# Altium PCB BEAGLEPLAYV020_220915.brd.PcbDoc (part 6 of 12)
Units mil, origin at the board's own origin, x right, y up, seen from the top; angles counter-clockwise.
Board outline 3149.7 x 3149.7 mil, 8 copper layers (TOP, LYR2_GND, LYR3, LAY4_PWR1, LAY5_PWR2, LAY6, LYR7_GND, BOTTOM), stack 60.84 mil thick; 782 components, 546 nets, 2864 pads, 2056 vias.
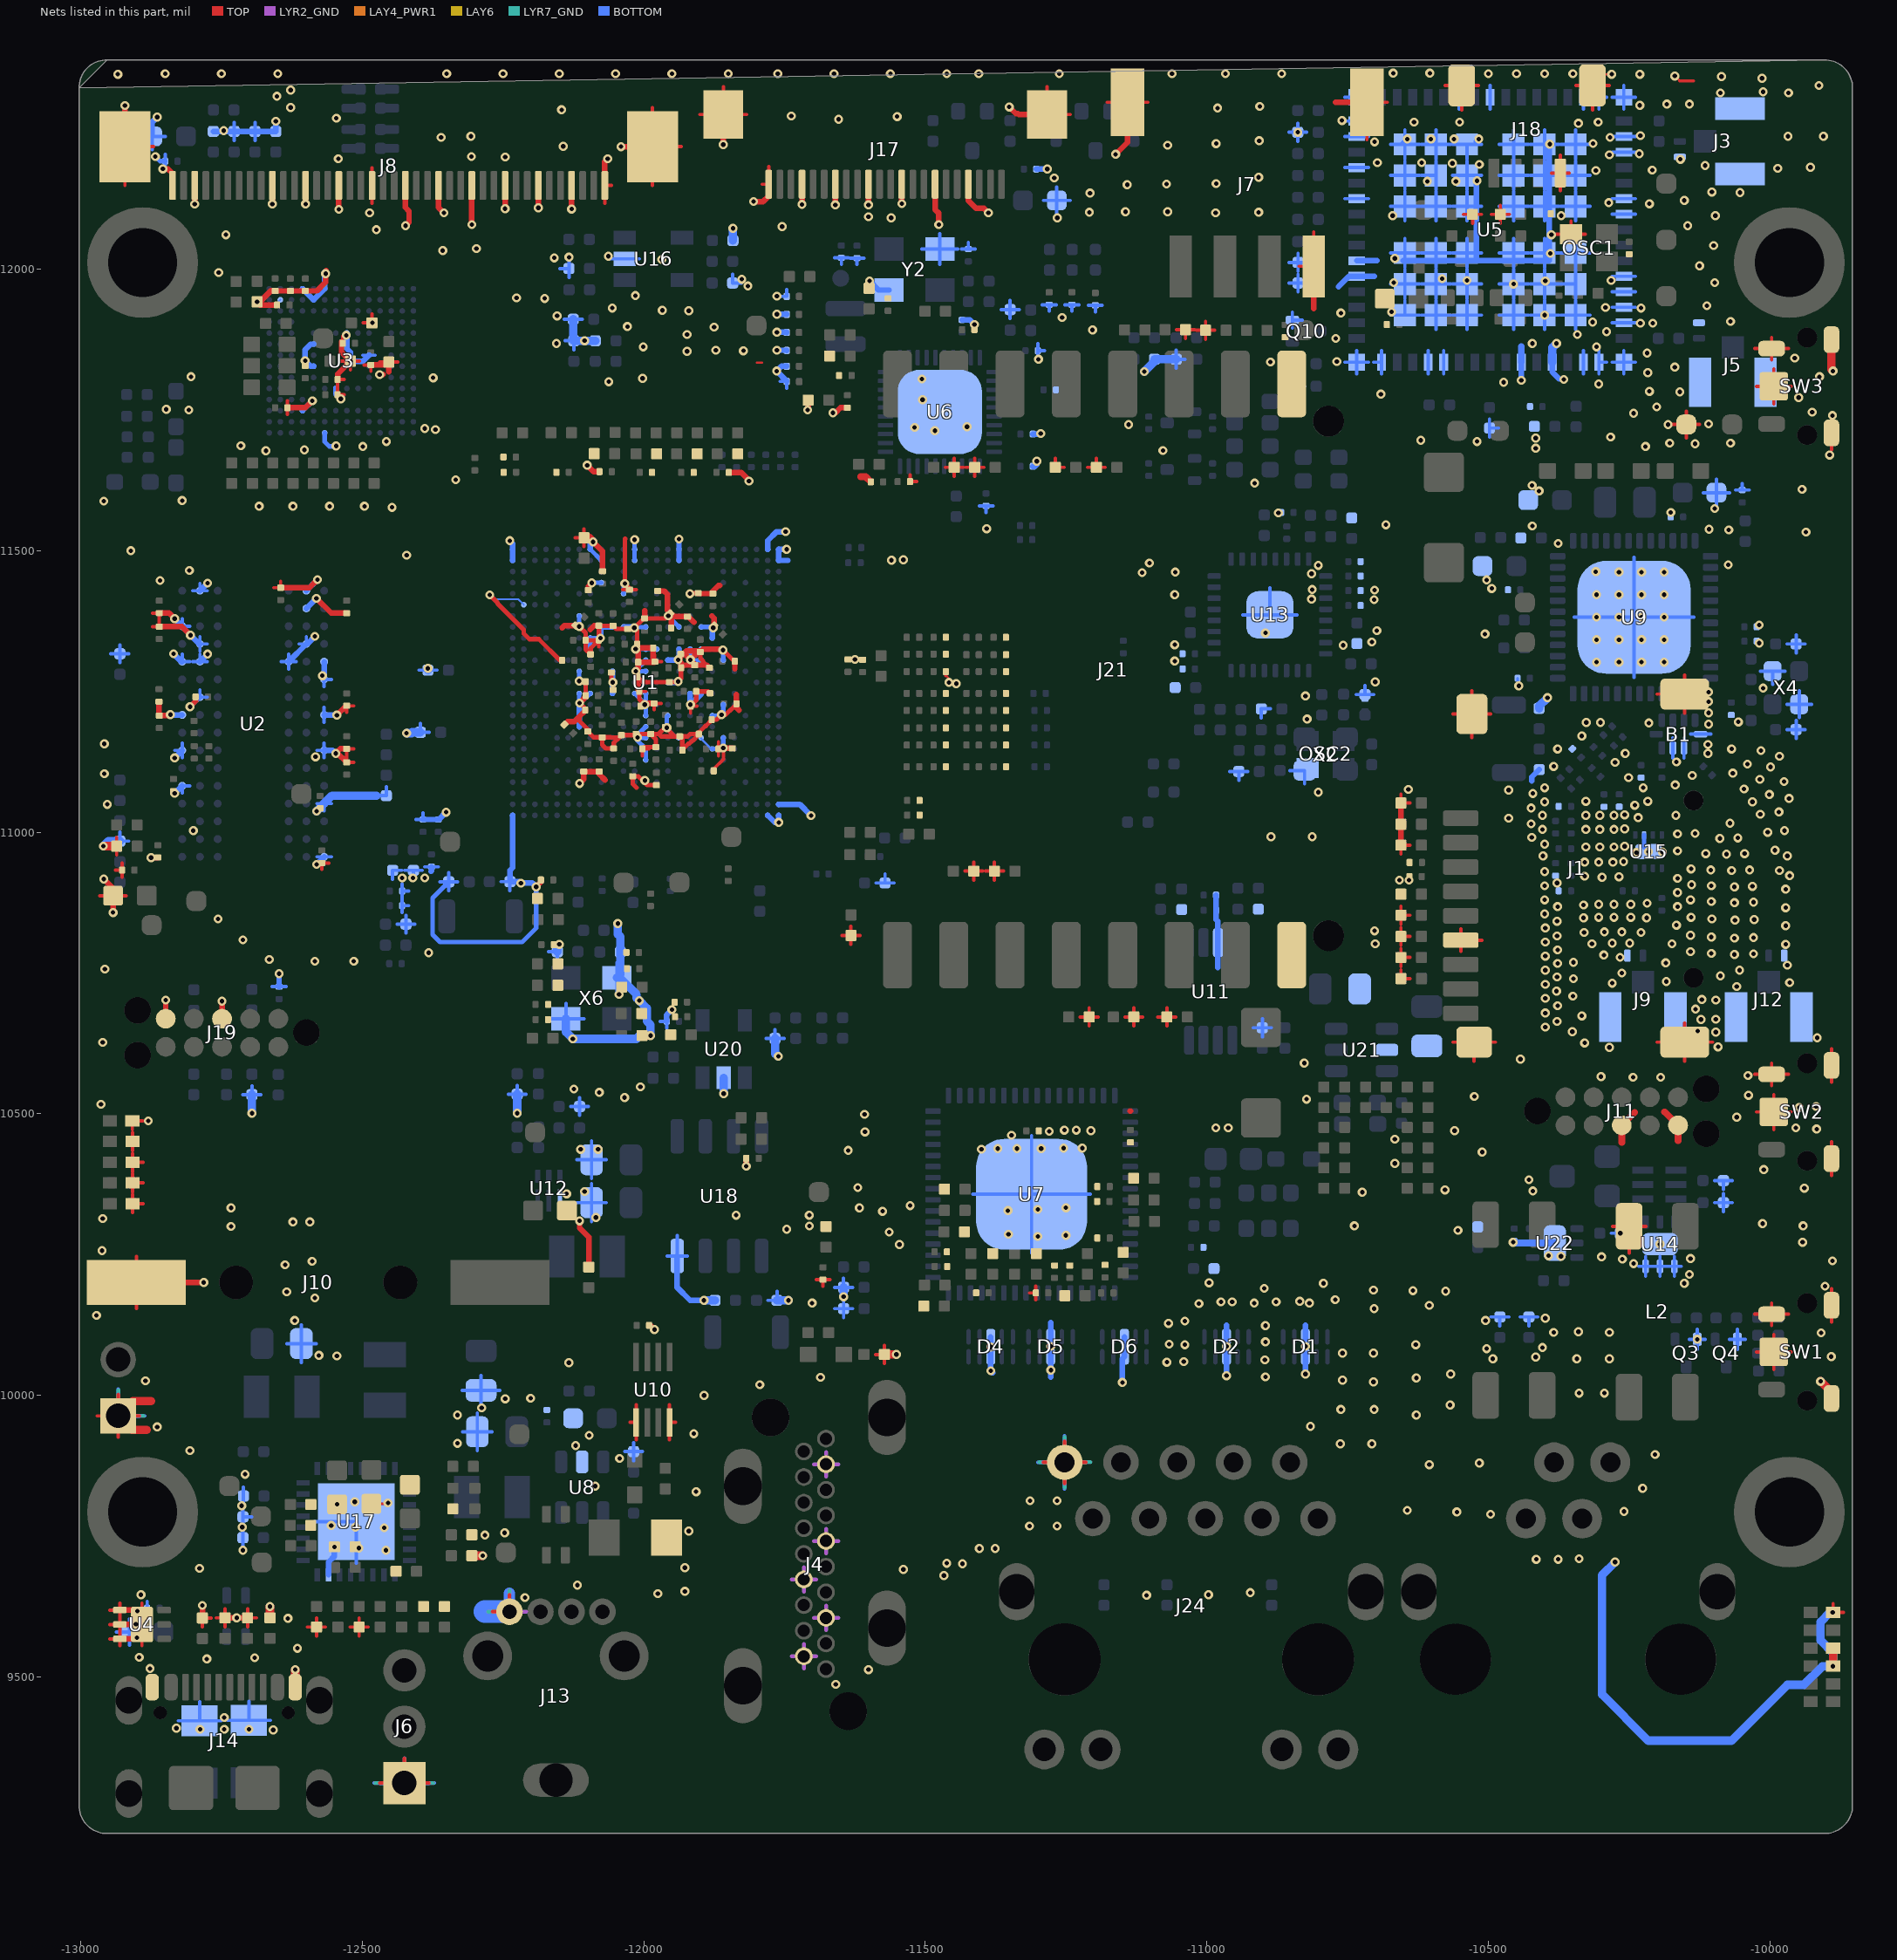
[diagram p12: the nets of this part, all layers, seen from the top]

## Via types
v1: diameter 16/0/16/0/0/0/0/16 (per signal layer), hole 8, TOP to BOTTOM, 334 vias
v2: diameter 16/16/0/0/0/0/16/16 (per signal layer), hole 8, TOP to BOTTOM, 282 vias
v3: diameter 16/0/0/0/0/16/0/16 (per signal layer), hole 8, TOP to BOTTOM, 255 vias
v4: diameter 16/16/0/0/0/16/16/16 (per signal layer), hole 8, TOP to BOTTOM, 253 vias
v5: diameter 16, hole 8, TOP to BOTTOM, 212 vias
v6: diameter 16/16/16/0/0/16/16/16 (per signal layer), hole 8, TOP to BOTTOM, 173 vias
v7: diameter 16/0/0/16/0/0/0/16 (per signal layer), hole 8, TOP to BOTTOM, 131 vias
v8: diameter 16/0/0/0/16/0/0/16 (per signal layer), hole 8, TOP to BOTTOM, 98 vias
v9: diameter 16/16/0/16/0/0/16/16 (per signal layer), hole 8, TOP to BOTTOM, 93 vias
v10: diameter 16/0/16/0/0/16/0/16 (per signal layer), hole 8, TOP to BOTTOM, 87 vias
v11: diameter 16/16/0/16/0/16/16/16 (per signal layer), hole 8, TOP to BOTTOM, 44 vias
v12: diameter 16/16/16/16/0/16/16/16 (per signal layer), hole 8, TOP to BOTTOM, 40 vias
v13: diameter 16/16/16/0/0/0/16/16 (per signal layer), hole 8, TOP to BOTTOM, 19 vias
v14: diameter 16/0/0/16/0/16/0/16 (per signal layer), hole 8, TOP to BOTTOM, 15 vias
v15: diameter 16/0/0/0/16/16/0/16 (per signal layer), hole 8, TOP to BOTTOM, 13 vias
v16: diameter 16/0/16/0/16/0/0/16 (per signal layer), hole 8, TOP to BOTTOM, 3 vias
v17: diameter 16/0/16/16/0/0/0/16 (per signal layer), hole 8, TOP to BOTTOM, 3 vias
v18: diameter 16/16/16/16/0/0/16/16 (per signal layer), hole 8, TOP to BOTTOM, 1 vias

## Nets (pads, with @x,y where several pads share a name; then routed paths per layer and width w, separated by ;. In a path a pad name is that pad's centre, name@x,y a point inside that pad or via, vN(x,y) a via of type N, cw(c..) or ccw(c..) an arc to the next point about the centre after c; other vN are vias at no path point) (continued)
GND: (continued)
  BOTTOM w6: -12946.31,11317.01 R1.2@-12930.44,11317.01 ; -12936.52,9580 C44.2@-12913,9580 ; -12933.34,10011.18 J16.1@-12933.34,9963.66 -12885.82,9963.66 ; -12930.44,10968.48 R83.2@-12930.44,10984.35 ; -12930.44,11000.22 R83.2@-12930.44,10984.35 ; -12930.44,11301.14 R1.2@-12930.44,11317.01 ; -12930.44,11332.88 R1.2@-12930.44,11317.01 ; -12914.57,10984.35 R83.2@-12930.44,10984.35 ; -12914.57,11317.01 R1.2@-12930.44,11317.01 ; -12913,9556.48 C44.2@-12913,9580 ; -12913,9603.52 C44.2@-12913,9580 ; -12896.52,12235.7 C268.2@-12873,12235.7 ; v2@-12893.52,9622 C130.2@-12882,9622 ; -12889.48,9580 C44.2@-12913,9580 ; -12882,9609.73 C130.2@-12882,9622 ; -12882,9634.27 C130.2@-12882,9622 ; -12873,12212.18 C268.2@-12873,12235.7 ; v4@-12850,12179.43 C267.2@-12850,12191.7 -12850,12203.97 ; -12849.48,12235.7 C268.2@-12873,12235.7 ; -12832.68,11145.45 U2.K9@-12819.66,11145.45 ; -12832.68,11365.95 U2.C9@-12819.66,11365.95 ; -12826.88,9422.2 R38.1@-12788.86,9422.2 ; -12819.66,11069.43 U2.M9@-12819.66,11082.45 -12806.64,11082.45 ; -12819.66,11132.43 U2.K9@-12819.66,11145.45 ; -12819.66,11158.47 U2.K9@-12819.66,11145.45 ; -12819.66,11315.97 U2.E9@-12819.66,11302.95 -12806.64,11302.95 ; -12819.66,11378.97 U2.C9@-12819.66,11365.95 ; -12806.64,11365.95 U2.C9@-12819.66,11365.95 ; -12801.18,11302.95 U2.E8@-12788.16,11302.95 ; -12801.18,11428.95 U2.A8@-12788.16,11428.95 ; -12788.86,9455.72 R38.1@-12788.86,9422.2 ; -12788.16,11252.97 U2.G8@-12788.16,11239.95 -12775.14,11239.95 ; -12788.16,11315.97 U2.E8@-12788.16,11302.95 ; -12788.16,11321.43 U2.D8@-12788.16,11334.45 ; -12788.16,11347.47 U2.D8@-12788.16,11334.45 ; -12788.16,11441.97 U2.A8@-12788.16,11428.95 ; -12775.14,11302.95 U2.E8@-12788.16,11302.95 ; -12775.14,11334.45 U2.D8@-12788.16,11334.45 ; -12775.14,11428.95 U2.A8@-12788.16,11428.95 ; -12750.84,9422.2 R38.1@-12788.86,9422.2 ; v2@-12739.36,9423 C105.1@-12701.34,9423 ; -12727.5,12228.68 R242.2@-12727.5,12244.55 -12727.5,12260.42 ; v2@-12711.93,9731.47 C48.2@-12711.93,9747.34 v2@-12711.93,9763.21 ; v2@-12711.89,9768.47 C47.2@-12711.89,9784.34 ; v2@-12711.89,9800.21 C47.2@-12711.89,9784.34 ; -12711.73,10534.03 R158.2@-12695.86,10534.03 ; v2@-12710.85,9805.47 C46.2@-12710.85,9821.34 -12710.85,9837.21 ; -12701.34,9456.52 C105.1@-12701.34,9423 ; -12696.02,9784.34 C47.2@-12711.89,9784.34 ; -12695.86,10549.9 R158.2@-12695.86,10534.03 ; -12690.5,12228.68 R240.2@-12690.5,12244.55 -12690.5,12260.42 ; -12679.99,10534.03 R158.2@-12695.86,10534.03 ; -12663.32,9423 C105.1@-12701.34,9423 ; -12659.93,10725.8 C260.2@-12647.66,10725.8 -12635.39,10725.8 ; -12643.68,11302.95 U2.E3@-12630.66,11302.95 ; -12634.02,10092 C54.2@-12608,10092 ; -12630.66,11289.93 U2.E3@-12630.66,11302.95 ; -12630.66,11315.97 U2.E3@-12630.66,11302.95 ; -12617.64,11302.95 U2.E3@-12630.66,11302.95 ; -12612.18,11334.45 U2.D2@-12599.16,11334.45 -12599.16,11347.47 ; -12608,10058.48 C54.2@-12608,10092 ; -12608,10125.52 C54.2@-12608,10092 ; -12584.63,9775.8 U17.33@-12510.69,9775.8 -12510.69,9701.86 ; -12581.98,10092 C54.2@-12608,10092 ; -12580.68,10956.45 U2.T1@-12567.66,10956.45 ; -12580.68,11050.95 U2.N1@-12567.66,11050.95 ; -12580.68,11145.45 U2.K1@-12567.66,11145.45 ; -12567.66,10943.43 U2.T1@-12567.66,10956.45 ; -12567.66,11037.93 U2.N1@-12567.66,11050.95 ; -12567.66,11132.43 U2.K1@-12567.66,11145.45 ; -12567.66,11158.47 U2.K1@-12567.66,11145.45 ; -12567.66,11195.43 U2.H1@-12567.66,11208.45 -12567.66,11221.47 ; -12567.66,11258.43 U2.F1@-12567.66,11271.45 -12554.64,11271.45 ; -12554.64,10956.45 U2.T1@-12567.66,10956.45 ; -12554.64,11050.95 U2.N1@-12567.66,11050.95 ; -12498.93,11847.13 U3.H10@-12487.91,11847.13 -12476.89,11847.13 ; -12478.6,9311.76 J6.1@-12425.08,9311.76 -12371.56,9311.76 ; -12473.03,11064.99 R82.2@-12457.16,11064.99 -12457.16,11080.86 ; -12446,10916.62 C231.2@-12446,10932.49 -12430.13,10932.49 ; -12438.14,10836.84 R87.2@-12422.27,10836.84 ; -12429,10857.43 C122.2@-12429,10869.7 ; -12429,10881.97 C122.2@-12429,10869.7 ; -12429,10883.43 C124.2@-12429,10895.7 ; -12429,10907.97 C124.2@-12429,10895.7 ; -12424.87,10932.49 C224.2@-12409,10932.49 ; -12422.27,10820.97 R87.2@-12422.27,10836.84 ; -12422.27,10852.71 R87.2@-12422.27,10836.84 ; -12417.48,10869.7 C122.2@-12429,10869.7 ; -12417.48,10895.7 C124.2@-12429,10895.7 ; v9@-12409,10916.62 C224.2@-12409,10932.49 ; -12406.4,10836.84 R87.2@-12422.27,10836.84 ; -12404.27,11022.7 C229.2@-12392,11022.7 -12392,11034.22 ; -12399.24,11287.84 R88.1@-12383.37,11287.84 -12367.5,11287.84 ; -12396.93,11193.43 R85.2@-12396.93,11177.56 -12381.06,11177.56 ; -12393.13,10932.49 C224.2@-12409,10932.49 ; -12389.27,10938.7 C225.2@-12377,10938.7 -12364.73,10938.7 ; -12362.16,10912.04 C127.2@-12346.29,10912.04 ; -12346.29,10896.17 C127.2@-12346.29,10912.04 ; -12346.29,10927.91 C127.2@-12346.29,10912.04 ; -12330.42,10912.04 C127.2@-12346.29,10912.04 ; -12322.52,10009 C60.2@-12289,10009 ; -12321.64,9935.34 C50.2@-12295.62,9935.34 ; -12295.62,9901.82 C50.2@-12295.62,9935.34 ; -12295.62,9968.86 C50.2@-12295.62,9935.34 ; v2@-12289,9982.98 C60.2@-12289,10009 ; -12289,10035.02 C60.2@-12289,10009 ; -12269.6,9935.34 C50.2@-12295.62,9935.34 ; -12255.48,10009 C60.2@-12289,10009 ; -12253.62,10912.36 C126.2@-12237.75,10912.36 -12237.75,10896.49 ; -12240.73,10534.81 R141.2@-12224.86,10534.81 ; -12224.86,10550.68 R141.2@-12224.86,10534.81 ; -12208.99,10534.81 R141.2@-12224.86,10534.81 ; -12170.24,10668.86 X6.2@-12138.22,10668.86 ; -12169.28,10788.04 C128.2@-12153.41,10788.04 -12153.41,10772.17 ; -12148.68,12001.04 C204.2@-12132.81,12001.04 ; -12141.08,11911 R94.1@-12125.21,11911 -12109.34,11911 ; -12140.01,11872.83 R131.2@-12124.14,11872.83 ; -12138.22,10695.88 X6.2@-12138.22,10668.86 ; -12132.81,11985.17 C204.2@-12132.81,12001.04 ; v2@-12132.81,12016.91 C204.2@-12132.81,12001.04 ; -12129.87,10513 R261.2@-12114,10513 ; -12124.14,11856.96 R131.2@-12124.14,11872.83 ; -12124.14,11888.7 R131.2@-12124.14,11872.83 ; -12118.72,10342.34 C135.2@-12092.7,10342.34 ; -12118.72,10418.34 C134.2@-12092.7,10418.34 ; -12114,10497.13 R261.2@-12114,10513 ; -12114,10528.87 R261.2@-12114,10513 ; -12106.2,10668.86 X6.2@-12138.22,10668.86 ; -12098.13,10513 R261.2@-12114,10513 ; -12092.7,10308.82 C135.2@-12092.7,10342.34 ; -12092.7,10375.86 C135.2@-12092.7,10342.34 ; -12092.7,10384.82 C134.2@-12092.7,10418.34 ; -12092.7,10451.86 C134.2@-12092.7,10418.34 ; -12066.68,10342.34 C135.2@-12092.7,10342.34 ; -12066.68,10418.34 C134.2@-12092.7,10418.34 ; v2@-12059.86,12018.36 U16.2@-12033.84,12018.36 -12007.82,12018.36 ; v2@-12047.66,10714.68 X6.4@-12047.66,10741.7 -12047.66,10768.72 ; -12033.87,9900.21 R152.2@-12018,9900.21 ; -12018,9884.34 R152.2@-12018,9900.21 ; -12018,9916.08 R152.2@-12018,9900.21 ; v2@-12011.72,11167.78 v2(-12011,11168.5) ; -12002.13,9900.21 R152.2@-12018,9900.21 ; -11970.88,10664.34 C266.2@-11959.36,10664.34 -11959.36,10652.07 ; v2(-11958.9,11185.7) -11940.98,11167.78 U1.H16@-11937.44,11167.78 ; -11958.49,10247.56 U18.4@-11940.66,10247.56 ; -11940.66,10284.09 U18.4@-11940.66,10247.56 ; -11922.83,10247.56 U18.4@-11940.66,10247.56 ; v2(-11917.1,11306.35) -11898.19,11325.26 U1.T18@-11898.08,11325.26 ; -11842.11,11991.23 C263.2@-11842.11,11975.36 v2@-11826.24,11975.36 ; -11782.73,10633.79 R213.2@-11766.86,10633.79 ; -11779.16,10168.86 C261.2@-11763.29,10168.86 -11763.29,10184.73 ; -11766.86,10649.66 R213.2@-11766.86,10633.79 ; -11757.66,11800.61 R47.1@-11746.14,11800.61 -11746.14,11788.34 ; v2@-11757.66,11951.61 R61.1@-11746.14,11951.61 -11746.14,11963.88 ; -11750.99,10633.79 R213.2@-11766.86,10633.79 ; -11661.27,12020 R277.2@-11649,12020 ; -11661.04,10191.86 R147.2@-11645.17,10191.86 ; -11660.84,10154 R256.2@-11644.97,10154 ; -11649,12008.48 R277.2@-11649,12020 ; -11645.17,10207.73 R147.2@-11645.17,10191.86 ; -11644.97,10138.13 R256.2@-11644.97,10154 ; v9@-11644.97,10169.87 R256.2@-11644.97,10154 ; -11636.73,12020 R277.2@-11649,12020 ; -11633.54,12019.62 C88.2@-11621.27,12019.62 ; -11629.3,10191.86 R147.2@-11645.17,10191.86 ; -11629.1,10154 R256.2@-11644.97,10154 ; -11621.27,12008.1 C88.2@-11621.27,12019.62 ; -11609,12019.62 C88.2@-11621.27,12019.62 ; -11587.36,10910 R251.2@-11571.49,10910 ; -11571.49,10925.87 R251.2@-11571.49,10910 ; -11555.62,10910 R251.2@-11571.49,10910 ; -11506.12,12035.75 Y2.2@-11474.1,12035.75 ; -11474.1,12008.73 Y2.2@-11474.1,12035.75 ; -11474.1,12062.77 Y2.2@-11474.1,12035.75 ; -11442.08,12035.75 Y2.2@-11474.1,12035.75 ; -11435.8,12035.68 C89.2@-11423.53,12035.68 ; -11423.53,12047.2 C89.2@-11423.53,12035.68 ; -11415.68,10357.2 U7.65@-11311.23,10357.2 ; -11411.26,12035.68 C89.2@-11423.53,12035.68 ; -11404.28,11579.61 C90.1@-11392.01,11579.61 ; -11392.01,11568.09 C90.1@-11392.01,11579.61 ; -11379.74,11579.61 C90.1@-11392.01,11579.61 ; -11365.2,11928.17 R33.2@-11349.33,11928.17 ; -11349.33,11912.3 R33.2@-11349.33,11928.17 ; -11349.33,11944.04 R33.2@-11349.33,11928.17 ; -11333.46,11928.17 R33.2@-11349.33,11928.17 ; -11311.23,10252.75 U7.65@-11311.23,10357.2 ; -11311.23,10461.65 U7.65@-11311.23,10357.2 ; v4@-11300.16,11842.82 C108.2@-11300.16,11855.09 ; -11300.16,11867.36 C108.2@-11300.16,11855.09 ; -11300.1,9881.2 J24.1@-11252.58,9881.2 ; -11292.27,11936.81 R253.1@-11280,11936.81 ; -11290.02,12121.96 C258.2@-11266.5,12121.96 ; -11288.64,11855.09 C108.2@-11300.16,11855.09 ; -11280,11925.29 R253.1@-11280,11936.81 ; -11267.73,11936.81 R253.1@-11280,11936.81 ; v4@-11266.5,12098.44 C258.2@-11266.5,12121.96 ; -11266.5,12145.48 C258.2@-11266.5,12121.96 ; -11252.58,9833.68 J24.1@-11252.58,9881.2 ; -11252.58,9928.72 J24.1@-11252.58,9881.2 ; -11251.87,11936.81 R308.1@-11239.6,11936.81 ; -11242.98,12121.96 C258.2@-11266.5,12121.96 ; -11239.6,11925.29 R308.1@-11239.6,11936.81 ; -11227.33,11936.81 R308.1@-11239.6,11936.81 ; -11210.27,11935.81 R310.1@-11198,11935.81 ; -11206.78,10357.2 U7.65@-11311.23,10357.2 ; -11198,11924.29 R310.1@-11198,11935.81 ; -11185.73,11935.81 R310.1@-11198,11935.81 ; -11054.42,11824.13 D52.1@-11054.42,11840 ; -11054.42,11855.87 D52.1@-11054.42,11840 ; -11038.55,11840 D52.1@-11054.42,11840 ; -10959.08,11108 R272.2@-10943.21,11108 ; -10943.21,11092.13 R272.2@-10943.21,11108 ; -10936.15,11386 U13.33@-10888,11386 ; -10927.34,11108 R272.2@-10943.21,11108 ; -10917.23,10652.85 C235.2@-10901.36,10652.85 ; -10903.29,11203.27 C2.2@-10903.29,11219.14 -10887.42,11219.14 ; -10901.36,10636.98 C235.2@-10901.36,10652.85 ; -10901.36,10668.72 C235.2@-10901.36,10652.85 ; -10888,11434.15 U13.33@-10888,11386 ; -10885.49,10652.85 C235.2@-10901.36,10652.85 ; -10858.08,11792 R29.2@-10842.21,11792 ; -10854.38,12243.02 v4(-10838.51,12243.02) ; -10853.87,11975.3 R17.2@-10838,11975.3 ; -10853.87,12011.94 R218.2@-10838,12011.94 ; -10852.11,11109.47 OSC2.2@-10826.4,11109.47 -10826.4,11085.73 ; -10848.11,11895.79 Q10.2@-10848.11,11909.69 ; -10848.11,11923.59 Q10.2@-10848.11,11909.69 ; -10842.21,11776.13 R29.2@-10842.21,11792 ; -10842.21,11807.87 R29.2@-10842.21,11792 ; -10839.85,11386 U13.33@-10888,11386 ; -10838.51,12227.15 v4(-10838.51,12243.02) ; -10838.51,12258.89 v4(-10838.51,12243.02) ; -10838,11959.43 R17.2@-10838,11975.3 ; -10838,11991.17 R17.2@-10838,11975.3 ; -10838,11996.07 R218.2@-10838,12011.94 ; -10838,12027.81 R218.2@-10838,12011.94 ; -10830.28,11909.69 Q10.2@-10848.11,11909.69 ; -10826.34,11792 R29.2@-10842.21,11792 ; -10822.64,12243.02 v4(-10838.51,12243.02) ; -10822.13,11975.3 R17.2@-10838,11975.3 ; -10822.13,12011.94 R218.2@-10838,12011.94 ; -10754.63,11834.76 U5.49@-10733.84,11834.76 ; -10754.63,12125.12 U5.59@-10733.84,12125.12 -10713.05,12125.12 ; -10754.63,12180.24 U5.61@-10733.84,12180.24 -10713.05,12180.24 ; -10754.63,12235.35 U5.63@-10733.84,12235.35 -10713.05,12235.35 ; v4@-10754.63,12262.91 U5.64@-10733.84,12262.91 ; -10754.63,12305.24 U5.1@-10733.84,12305.24 ; -10735.01,11244.53 R220.2@-10719.14,11244.53 ; -10733.84,11813.97 U5.49@-10733.84,11834.76 ; -10733.84,11855.55 U5.49@-10733.84,11834.76 ; -10733.84,12276.81 U5.64@-10733.84,12262.91 ; -10733.84,12284.45 U5.1@-10733.84,12305.24 ; -10733.84,12326.03 U5.1@-10733.84,12305.24 ; -10719.14,11260.4 R220.2@-10719.14,11244.53 ; -10713.05,11834.76 U5.49@-10733.84,11834.76 ; -10713.05,12262.91 U5.64@-10733.84,12262.91 ; -10713.05,12305.24 U5.1@-10733.84,12305.24 ; -10703.45,11834.76 U5.48@-10689.55,11834.76 ; -10703.27,11244.53 R220.2@-10719.14,11244.53 ; -10689.55,11813.97 U5.48@-10689.55,11834.76 ; -10689.55,11855.55 U5.48@-10689.55,11834.76 ; v4@-10673.92,11918.43 U5.G25@-10648.21,11918.43 ; v4@-10673.92,11973.54 U5.G22@-10648.21,11973.54 ; -10673.92,12028.66 U5.G19@-10648.21,12028.66 ; -10673.92,12111.34 U5.G7@-10648.21,12111.34 ; -10673.92,12166.46 U5.G4@-10648.21,12166.46 ; -10673.92,12221.57 U5.G1@-10648.21,12221.57 ; -10648.21,11944.14 U5.G25@-10648.21,11918.43 ; -10648.21,11947.83 U5.G22@-10648.21,11973.54 ; -10648.21,11999.25 U5.G22@-10648.21,11973.54 ; -10648.21,12002.95 U5.G19@-10648.21,12028.66 ; -10648.21,12054.37 U5.G19@-10648.21,12028.66 ; -10648.21,12085.63 U5.G7@-10648.21,12111.34 ; -10648.21,12137.05 U5.G7@-10648.21,12111.34 ; -10648.21,12140.75 U5.G4@-10648.21,12166.46 ; -10648.21,12192.17 U5.G4@-10648.21,12166.46 ; -10648.21,12195.86 U5.G1@-10648.21,12221.57 ; -10648.21,12247.28 U5.G1@-10648.21,12221.57 ; -10622.5,11918.43 U5.G25@-10648.21,11918.43 ; -10622.5,11973.54 U5.G22@-10648.21,11973.54 ; -10622.5,12028.66 U5.G19@-10648.21,12028.66 ; -10622.5,12111.34 U5.G7@-10648.21,12111.34 ; -10622.5,12166.46 U5.G4@-10648.21,12166.46 ; -10622.5,12221.57 U5.G1@-10648.21,12221.57 ; -10618.81,11918.43 U5.G26@-10593.1,11918.43 ; -10618.81,11973.54 U5.G23@-10593.1,11973.54 ; -10618.81,12028.66 U5.G20@-10593.1,12028.66 ; -10618.81,12111.34 U5.G8@-10593.1,12111.34 ; -10618.81,12166.46 U5.G5@-10593.1,12166.46 ; -10618.81,12221.57 U5.G2@-10593.1,12221.57 ; -10606.88,11813.97 U5.45@-10606.88,11834.76 -10606.88,11855.55 ; -10593.1,11892.72 U5.G26@-10593.1,11918.43 ; -10593.1,11944.14 U5.G26@-10593.1,11918.43 ; -10593.1,11947.83 U5.G23@-10593.1,11973.54 ; -10593.1,11999.25 U5.G23@-10593.1,11973.54 ; -10593.1,12002.95 U5.G20@-10593.1,12028.66 ; -10593.1,12054.37 U5.G20@-10593.1,12028.66 ; -10593.1,12085.63 U5.G8@-10593.1,12111.34 ; -10593.1,12137.05 U5.G8@-10593.1,12111.34 ; -10593.1,12140.75 U5.G5@-10593.1,12166.46 ; -10593.1,12192.17 U5.G5@-10593.1,12166.46 ; -10593.1,12195.86 U5.G2@-10593.1,12221.57 ; -10593.1,12247.28 U5.G2@-10593.1,12221.57 ; -10579.32,11813.97 U5.44@-10579.32,11834.76 -10579.32,11855.55 ; -10567.39,11918.43 U5.G26@-10593.1,11918.43 ; -10567.39,11973.54 U5.G23@-10593.1,11973.54 ; -10567.39,12028.66 U5.G20@-10593.1,12028.66 ; -10567.39,12111.34 U5.G8@-10593.1,12111.34 ; -10567.39,12221.57 U5.G2@-10593.1,12221.57 ; -10563.69,11918.43 U5.G27@-10537.98,11918.43 ; -10563.69,11973.54 U5.G24@-10537.98,11973.54 ; -10563.69,12028.66 U5.G21@-10537.98,12028.66 ; -10563.69,12111.34 U5.G9@-10537.98,12111.34 ; -10563.69,12166.46 U5.G6@-10537.98,12166.46 ; -10563.69,12221.57 U5.G3@-10537.98,12221.57 ; -10551.76,12284.45 U5.7@-10551.76,12305.24 -10551.76,12326.03 ; -10537.98,11892.72 U5.G27@-10537.98,11918.43 ; -10537.98,11944.14 U5.G27@-10537.98,11918.43 ; -10537.98,11947.83 U5.G24@-10537.98,11973.54 ; -10537.98,11999.25 U5.G24@-10537.98,11973.54 ; -10537.98,12002.95 U5.G21@-10537.98,12028.66 ; -10537.98,12054.37 U5.G21@-10537.98,12028.66 ; -10537.98,12085.63 U5.G9@-10537.98,12111.34 ; -10537.98,12137.05 U5.G9@-10537.98,12111.34 ; -10537.98,12140.75 U5.G6@-10537.98,12166.46 ; -10537.98,12192.17 U5.G6@-10537.98,12166.46 ; -10537.98,12195.86 U5.G3@-10537.98,12221.57 ; -10512.27,11918.43 U5.G27@-10537.98,11918.43 ; -10512.27,11973.54 U5.G24@-10537.98,11973.54 ; -10512.27,12028.66 U5.G21@-10537.98,12028.66 ; -10512.27,12111.34 U5.G9@-10537.98,12111.34 ; -10512.27,12166.46 U5.G6@-10537.98,12166.46 ; -10512.27,12221.57 U5.G3@-10537.98,12221.57 ; -10498,11701.92 R28.2@-10498,11717.79 ; -10498,11733.66 R28.2@-10498,11717.79 ; -10496.64,12284.45 U5.9@-10496.64,12305.24 -10496.64,12326.03 ; -10495.54,10139.35 C16.2@-10479.67,10139.35 ; -10482.13,11717.79 R28.2@-10498,11717.79 ; -10481.01,11918.43 U5.G34@-10455.3,11918.43 ; -10481.01,11973.54 v4(-10455.3,11973.54) ; -10481.01,12028.66 U5.G28@-10455.3,12028.66 ; -10481.01,12111.34 U5.G16@-10455.3,12111.34 ; -10481.01,12166.46 U5.G13@-10455.3,12166.46 ; -10481.01,12221.57 U5.G10@-10455.3,12221.57 ; -10479.67,10123.48 C16.2@-10479.67,10139.35 ; -10463.8,10139.35 C16.2@-10479.67,10139.35 ; -10455.3,11892.72 U5.G34@-10455.3,11918.43 ; -10455.3,11944.14 U5.G34@-10455.3,11918.43 ; -10455.3,11947.83 v4(-10455.3,11973.54) ; -10455.3,11999.25 v4(-10455.3,11973.54) ; -10455.3,12002.95 U5.G28@-10455.3,12028.66 ; -10455.3,12054.37 U5.G28@-10455.3,12028.66 ; -10455.3,12085.63 U5.G16@-10455.3,12111.34 ; -10455.3,12137.05 U5.G16@-10455.3,12111.34 ; -10455.3,12140.75 U5.G13@-10455.3,12166.46 ; -10455.3,12192.17 U5.G13@-10455.3,12166.46 ; -10455.3,12195.86 U5.G10@-10455.3,12221.57 ; -10455.3,12247.28 U5.G10@-10455.3,12221.57 ; -10443.88,10139.35 C17.2@-10428.01,10139.35 ; -10429.59,11918.43 U5.G34@-10455.3,11918.43 ; -10429.59,11973.54 v4(-10455.3,11973.54) ; -10429.59,12028.66 U5.G28@-10455.3,12028.66 ; -10429.59,12111.34 U5.G16@-10455.3,12111.34 ; -10429.59,12166.46 U5.G13@-10455.3,12166.46 ; -10429.59,12221.57 U5.G10@-10455.3,12221.57 ; -10428.01,10123.48 C17.2@-10428.01,10139.35 ; -10425.89,11918.43 v4(-10400.18,11918.43) ; -10425.89,11973.54 U5.G32@-10400.18,11973.54 ; -10425.89,12028.66 U5.G29@-10400.18,12028.66 ; -10425.89,12111.34 U5.G17@-10400.18,12111.34 ; -10425.89,12166.46 U5.G14@-10400.18,12166.46 ; -10425.89,12221.57 U5.G11@-10400.18,12221.57 ; -10412.14,10139.35 C17.2@-10428.01,10139.35 ; -10400.18,11892.72 v4(-10400.18,11918.43) ; -10400.18,11944.14 v4(-10400.18,11918.43) ; -10400.18,11947.83 U5.G32@-10400.18,11973.54 ; -10400.18,11999.25 U5.G32@-10400.18,11973.54 ; -10400.18,12002.95 U5.G29@-10400.18,12028.66 ; -10400.18,12054.37 U5.G29@-10400.18,12028.66 ; -10400.18,12085.63 U5.G17@-10400.18,12111.34 ; -10400.18,12137.05 U5.G17@-10400.18,12111.34 ; -10400.18,12140.75 U5.G14@-10400.18,12166.46 ; -10400.18,12192.17 U5.G14@-10400.18,12166.46 ; -10400.18,12195.86 U5.G11@-10400.18,12221.57 ; -10400.18,12247.28 U5.G11@-10400.18,12221.57 ; -10374.47,11918.43 v4(-10400.18,11918.43) ; -10374.47,11973.54 U5.G32@-10400.18,11973.54 ; -10374.47,12028.66 U5.G29@-10400.18,12028.66 ; -10374.47,12111.34 U5.G17@-10400.18,12111.34 ; -10374.47,12166.46 U5.G14@-10400.18,12166.46 ; -10374.47,12221.57 U5.G11@-10400.18,12221.57 ; -10370.78,11918.43 U5.G36@-10345.07,11918.43 ; -10370.78,11973.54 U5.G33@-10345.07,11973.54 ; -10370.78,12028.66 U5.G30@-10345.07,12028.66 ; -10370.78,12111.34 U5.G18@-10345.07,12111.34 ; -10370.78,12166.46 U5.G15@-10345.07,12166.46 ; -10370.78,12221.57 U5.G12@-10345.07,12221.57 ; -10347.64,11381.78 U9.49@-10241.22,11381.78 ; -10345.07,11892.72 U5.G36@-10345.07,11918.43 ; -10345.07,11944.14 U5.G36@-10345.07,11918.43 ; -10345.07,11947.83 U5.G33@-10345.07,11973.54 ; -10345.07,11999.25 U5.G33@-10345.07,11973.54 ; -10345.07,12002.95 U5.G30@-10345.07,12028.66 ; -10345.07,12054.37 U5.G30@-10345.07,12028.66 ; -10345.07,12085.63 U5.G18@-10345.07,12111.34 ; -10345.07,12137.05 U5.G18@-10345.07,12111.34 ; -10345.07,12140.75 U5.G15@-10345.07,12166.46 ; -10345.07,12192.17 U5.G15@-10345.07,12166.46 ; -10345.07,12195.86 U5.G12@-10345.07,12221.57 ; -10345.07,12247.28 U5.G12@-10345.07,12221.57 ; -10331.29,11813.97 U5.35@-10331.29,11834.76 -10331.29,11855.55 ; -10331.29,12284.45 U5.15@-10331.29,12305.24 -10331.29,12326.03 ; -10319.36,11918.43 U5.G36@-10345.07,11918.43 ; -10319.36,12028.66 U5.G30@-10345.07,12028.66 ; -10319.36,12111.34 U5.G18@-10345.07,12111.34 ; -10319.36,12166.46 U5.G15@-10345.07,12166.46 ; v4@-10319.36,12221.57 U5.G12@-10345.07,12221.57 ; -10303.73,11813.97 U5.34@-10303.73,11834.76 ; v4@-10303.73,11855.55 U5.34@-10303.73,11834.76 ; -10303.73,12284.45 U5.16@-10303.73,12305.24 ; -10303.73,12326.03 U5.16@-10303.73,12305.24 ; -10289.83,11834.76 U5.34@-10303.73,11834.76 ; -10289.83,12305.24 U5.16@-10303.73,12305.24 ; -10281.66,10288 v12(-10265.79,10288) ; -10280.23,11834.76 U5.33@-10259.44,11834.76 ; -10280.23,11904.65 U5.31@-10259.44,11904.65 -10238.65,11904.65 ; -10280.23,11932.2 U5.30@-10259.44,11932.2 -10238.65,11932.2 ; -10280.23,11959.76 U5.29@-10259.44,11959.76 -10238.65,11959.76 ; v4@-10280.23,11987.32 U5.28@-10259.44,11987.32 -10238.65,11987.32 ; -10280.23,12097.56 U5.24@-10259.44,12097.56 -10238.65,12097.56 ; -10280.23,12125.12 U5.23@-10259.44,12125.12 -10238.65,12125.12 ; v4@-10280.23,12207.8 U5.20@-10259.44,12207.8 v4@-10238.65,12207.8 ; v4@-10280.23,12235.35 U5.19@-10259.44,12235.35 -10238.65,12235.35 ; -10280.23,12305.24 U5.17@-10259.44,12305.24 ; -10265.79,10272.13 v12(-10265.79,10288) ; -10265.79,10303.87 v12(-10265.79,10288) ; -10259.44,11813.97 U5.33@-10259.44,11834.76 ; -10259.44,11855.55 U5.33@-10259.44,11834.76 ; -10259.44,12284.45 U5.17@-10259.44,12305.24 ; -10259.44,12326.03 U5.17@-10259.44,12305.24 ; -10249.92,10288 v12(-10265.79,10288) ; -10241.22,11275.36 U9.49@-10241.22,11381.78 ; -10241.22,11488.2 U9.49@-10241.22,11381.78 ; -10238.65,11834.76 U5.33@-10259.44,11834.76 ; -10238.65,12305.24 U5.17@-10259.44,12305.24 ; -10232.79,10229.19 U14.3@-10220.86,10229.19 ; -10220.86,10211.36 U14.3@-10220.86,10229.19 ; -10220.86,10247.02 U14.3@-10220.86,10229.19 ; -10208.93,10229.19 U14.3@-10220.86,10229.19 ; -10207.2,10229.19 U14.2@-10195.27,10229.19 ; -10195.27,10211.36 U14.2@-10195.27,10229.19 ; -10195.27,10247.02 U14.2@-10195.27,10229.19 ; -10183.34,10229.19 U14.2@-10195.27,10229.19 ; -10181.61,10229.19 U14.1@-10169.68,10229.19 ; -10172.32,11131.9 B1.3@-10172.32,11149.73 -10172.32,11167.56 ; -10169.68,10211.36 U14.1@-10169.68,10229.19 ; -10169.68,10247.02 U14.1@-10169.68,10229.19 ; -10157.75,10229.19 U14.1@-10169.68,10229.19 ; -10152.64,11131.9 B1.2@-10152.64,11149.73 -10152.64,11167.56 ; -10142.87,10099.69 v12(-10128.97,10099.69) ; -10140.94,11174.34 B1.10@-10123.11,11174.34 -10105.28,11174.34 ; -10134.8,11381.78 U9.49@-10241.22,11381.78 ; -10128.97,10081.86 v12(-10128.97,10099.69) ; -10128.97,10117.52 v12(-10128.97,10099.69) ; -10118.52,11603 C96.2@-10095,11603 ; -10115.07,10099.69 v12(-10128.97,10099.69) ; -10098.4,10342.2 R59.2@-10082.53,10342.2 ; -10098.4,10381.5 R56.2@-10082.53,10381.5 ; v2@-10095,11579.48 C96.2@-10095,11603 ; -10095,11626.52 C96.2@-10095,11603 ; -10082.53,10326.33 R59.2@-10082.53,10342.2 ; -10082.53,10358.07 R59.2@-10082.53,10342.2 ; -10082.53,10365.63 R56.2@-10082.53,10381.5 ; -10071.65,10099.69 Q4.2@-10057.75,10099.69 ; -10071.48,11603 C96.2@-10095,11603 ; -10066.66,10342.2 R59.2@-10082.53,10342.2 ; -10066.66,10381.5 R56.2@-10082.53,10381.5 ; -10061.27,11607.8 C20.2@-10049,11607.8 ; -10057.75,10081.86 Q4.2@-10057.75,10099.69 ; -10057.75,10117.52 Q4.2@-10057.75,10099.69 ; -10049,11619.32 C20.2@-10049,11607.8 ; -10043.85,10099.69 Q4.2@-10057.75,10099.69 ; -10036.73,11607.8 C20.2@-10049,11607.8 ; -10017.01,11286.27 X4.2@-9995.24,11286.27 ; -9995.24,11262.53 X4.2@-9995.24,11286.27 ; -9973.47,11286.27 X4.2@-9995.24,11286.27 ; -9969.77,11227.21 X4.4@-9948,11227.21 ; -9969.28,11182.36 C35.2@-9953.41,11182.36 ; -9969.28,11334.36 C36.2@-9953.41,11334.36 ; -9953.41,11166.49 C35.2@-9953.41,11182.36 ; -9953.41,11198.23 C35.2@-9953.41,11182.36 ; -9953.41,11318.49 C36.2@-9953.41,11334.36 ; -9953.41,11350.23 C36.2@-9953.41,11334.36 ; -9948,11203.47 X4.4@-9948,11227.21 ; -9948,11250.95 X4.4@-9948,11227.21 ; -9937.54,11182.36 C35.2@-9953.41,11182.36 ; -9937.54,11334.36 C36.2@-9953.41,11334.36 ; -9926.23,11227.21 X4.4@-9948,11227.21
  BOTTOM w8: v4(-12867.33,12200) -12859.03,12191.7 C267.2@-12850,12191.7 ; U3.A6@-12566.65,11709.34 -12566.65,11693.35 -12558.65,11685.35 -12547.33,11685.35 -12546.78,11685.9 v9(-12546.39,11685.9) ; C127.2@-12346.29,10912.04 -12375,10883.33 -12375,10818 -12362,10805 -12216,10805 -12191,10830 v2(-12191,10903) ; U1.M7@-12114.61,11246.52 -12114.61,11230.11 v2(-12114,11229.5) -12111.94,11229.5 U1.M8@-12094.92,11246.52 ; v2(-12114.61,11268.62) U1.P7@-12114.61,11285.88 ; v2(-12114.61,11365.31) U1.W7@-12114.61,11384.31 ; U1.T8@-12094.92,11325.26 U1.U8@-12094.92,11344.94 v2(-12076.92,11344.94) -12076.92,11345.39 -12075.24,11347.07 U1.V9@-12075.24,11364.62 ; U1.AE8@-12094.92,11502.42 U1.AD9@-12075.24,11482.74 ; v2(-12092.3,11442.81) -12091.7,11442.81 -12091.15,11443.36 U1.AB9@-12075.24,11443.36 ; U1.V11@-12035.87,11364.62 -12035.09,11365.4 -12019.15,11365.4 v2(-12016.71,11362.96) -12015.27,11364.4 -11996.72,11364.4 U1.V13@-11996.5,11364.62 ; U1.AA11@-12035.87,11423.68 -12035.87,11439.53 v2(-12033.7,11441.7) ; U1.M12@-12016.18,11246.52 -11998.2,11228.54 v2(-11998.18,11226.83) -11996.5,11228.53 U1.M13@-11996.5,11246.52 ; U1.AD12@-12016.18,11482.74 U1.AE12@-12016.18,11502.42 v2(-12016.18,11519.52) ; v2(-12014.5,11325.26) U1.T13@-11996.5,11325.26 U1.T14@-11976.82,11325.26 ; v2(-12011,11168.5) -12011,11172.96 U1.J13@-11996.5,11187.46 ; v2(-11998.18,11226.83) -11996.5,11225.13 U1.K13@-11996.5,11207.14 ; U1.F13@-11996.5,11128.4 U1.G13@-11996.5,11148.09 -12011.72,11163.31 -12011.72,11167.78 U1.H13@-11996.5,11167.78 ; U1.P13@-11996.5,11285.88 v2(-12014,11285.88) -12014,11288.07 U1.R13@-11996.5,11305.57 ; v2(-11958.9,11185.7) -11958.9,11205.37 U1.K15@-11957.13,11207.14 ; v2(-11956.34,11384.31) -11956.34,11383.52 U1.V16@-11937.44,11364.62 ; U1.T17@-11917.76,11325.26 -11917.76,11307.01 v2(-11917.1,11306.35) -11916.32,11305.57 U1.R18@-11898.08,11305.57 ; U1.V18@-11898.08,11364.62 -11878.35,11364.62 v2(-11876.69,11362.96) ; U1.G19@-11878.39,11148.09 -11860.22,11148.09 v2(-11858.7,11149.61) U1.H20@-11858.7,11167.78 ; U1.K19@-11878.39,11207.14 -11865.36,11207.14 -11863.8,11208.7 v2(-11862,11208.7) -11862,11210.5 -11858.7,11213.8 U1.L20@-11858.7,11226.83 ; v2(-11859.4,11323.59) -11858.7,11322.89 U1.R20@-11858.7,11305.57 ; U15.6@-10223.51,10995.14 -10223.51,10973.49 v6(-10215.63,10965.61)
  BOTTOM w10: C268.2@-12873,12235.7 -12873,12261 v4(-12864,12270) ; v4(-12867.33,12200) v4@-12867,12200 ; v9(-12840.72,11208.89) -12840.28,11208.45 U2.H9@-12819.66,11208.45 ; v9(-12835,11317) -12820.95,11302.95 U2.E9@-12819.66,11302.95 ; v9(-12833.1,11069.01) U2.M9@-12819.66,11082.45 ; v9(-12833.1,11132.01) U2.K9@-12819.66,11145.45 ; v9(-12833.1,11379.39) U2.C9@-12819.66,11365.95 ; v9(-12805.87,11222.93) -12788.85,11239.95 U2.G8@-12788.16,11239.95 ; v9(-12805,11350) -12789.45,11334.45 U2.D8@-12788.16,11334.45 ; U2.E8@-12788.16,11302.95 v9(-12774.72,11316.39) ; U2.A8@-12788.16,11428.95 v9(-12774.72,11442.39) ; R243.2@-12764.5,12244.55 -12748.45,12244.55 -12747,12246 v4(-12745.92,12246) -12744.47,12244.55 R242.2@-12727.5,12244.55 R240.2@-12690.5,12244.55 R241.2@-12653.5,12244.55 v4(-12653.5,12262.5) ; C260.2@-12647.66,10725.8 v9(-12647.66,10749) ; U2.E3@-12630.66,11302.95 U2.D2@-12599.16,11334.45 -12597.44,11334.45 v9(-12584,11347.89) ; U3.C4@-12606.02,11748.71 v2(-12588.52,11766.21) ; U3.P4@-12606.02,11965.24 U3.N5@-12586.33,11945.56 U3.P6@-12566.65,11965.24 -12566.65,11994.85 -12565,11993.2 v2(-12565,11992) ; U2.B2@-12599.16,11397.45 v9(-12581.3,11415.31) ; U2.A2@-12599.16,11428.95 v9(-12579.55,11448.56) ; U3.G5@-12586.33,11827.45 -12591.43,11827.45 v2(-12601.34,11837.36) -12601.34,11856.81 -12591.33,11866.82 U3.J5@-12586.33,11866.82 ; v9(-12581.1,10943.01) U2.T1@-12567.66,10956.45 ; v9(-12570.74,11278.05) -12567.66,11281.13 U2.E1@-12567.66,11302.95 ; U2.K1@-12567.66,11145.45 -12552.45,11145.45 v9(-12547,11140) ; U2.H1@-12567.66,11208.45 -12545.45,11208.45 v9(-12545,11208) ; U2.F1@-12567.66,11271.45 U2.F1@-12567.66,11274.97 ; U17.15@-12559.9,9681.31 -12559.9,9703.95 -12549.34,9714.51 v2(-12549.34,9731.01) ; U3.E7@-12546.96,11788.08 -12546.96,11778.66 v2(-12538,11769.7) ; U3.K8@-12527.28,11886.5 -12527.28,11858.93 -12520.91,11852.56 v2(-12520.91,11836.56) -12498.48,11836.56 U3.H10@-12487.91,11847.13 ; C229.2@-12392,11022.7 C230.2@-12365,11022.7 -12364,11022.7 v9(-12351,11035.7) ; -12378,10930.53 -12377,10931.53 C225.2@-12377,10938.7 ; v2(-12238,11517.7) -12232.72,11512.42 U1.AE1@-12232.72,11502.42 U1.AD1@-12232.72,11482.74 ; U1.A1@-12232.72,11029.98 -12232.72,10937.24 -12237.75,10932.21 C126.2@-12237.75,10912.36 -12221.66,10912.36 -12219,10909.7 v2(-12218.29,10909.7) -12197.7,10909.7 v2(-12191,10903) ; U1.J7@-12114.61,11187.46 U1.K7@-12114.61,11207.14 -12114.61,11228.89 v2(-12114,11229.5) ; U1.AE8@-12094.92,11502.42 -12094.92,11510.78 v2(-12090,11515.7) ; U1.V9@-12075.24,11364.62 U1.V10@-12055.56,11364.62 ; U1.M10@-12055.56,11246.52 -12055.56,11265.56 v2(-12054.92,11266.2) -12055.56,11266.84 U1.P10@-12055.56,11285.88 ; C266.2@-11959.36,10664.34 -11959.36,10675.64 v2(-11950,10685) ; U1.N15@-11957.13,11266.2 -11940.81,11266.2 v2(-11939.1,11267.91) ; U1.R15@-11957.13,11305.57 -11939.88,11305.57 v2(-11939.1,11306.35) -11937.44,11308.01 U1.T16@-11937.44,11325.26 ; U18.4@-11940.66,10247.56 -11940.66,10191.66 -11917.86,10168.86 v2(-11893.14,10168.86) ; U1.AD16@-11937.44,11482.74 U1.AE16@-11937.44,11502.42 v9(-11937.44,11520.7) ; U1.M17@-11917.76,11246.52 -11917.76,11227.49 v2(-11917.1,11226.83) -11898.08,11245.85 U1.M18@-11898.08,11246.52 ; U1.U19@-11878.39,11344.94 -11878.39,11361.24 v2@-11876.69,11362.94 ; U1.A24@-11779.96,11029.98 -11767.4,11017.42 v2(-11760.28,11017.42) U1.A25@-11760.28,11029.98 ; U1.AE24@-11779.96,11502.42 -11779.96,11517.74 -11764,11533.7 v2(-11748,11533.7) ; v2(-11763.64,11856) -11746.53,11856 R43.1@-11746.14,11855.61 ; v2(-11763.64,11888) -11746.53,11888 R45.1@-11746.14,11887.61 ; v2(-11763.64,11920) -11746.53,11920 R249.1@-11746.14,11919.61 ; U1.B25@-11760.28,11049.66 -11722.96,11049.66 v2(-11703,11029.7) ; v2(-11746.38,11502.42) U1.AE25@-11760.28,11502.42 U1.AD25@-11760.28,11482.74 -11744.26,11482.74 ; R47.1@-11746.14,11800.61 -11746.14,11801.14 v2(-11764,11819) -11755.39,11827.61 R41.1@-11746.14,11827.61 ; v4(-11599,11979) -11582.91,11962.91 Y2.4@-11564.66,11962.91 ; C298.2@-11434.69,11909.84 -11420.84,11909.84 v4(-11412.69,11901.69) ; D4.3@-11383.8,10104.09 v11(-11383.8,10086) D4.8@-11383.8,10068.65 v4(-11383.8,10043.8) v4@-11380,10040 ; C294.2@-11309,11649.82 -11305.18,11649.82 -11302,11653 v2(-11302,11659) ; C296.2@-11309,11707.05 -11295.95,11707.05 v4(-11295,11708) ; C259.2@-11303,12177.7 v4(-11283.3,12177.7) ; -11277.27,10032.73 D5.8@-11277.27,10068.65 D5.3@-11277.27,10104.09 -11277.27,10129.27 ; v4(-11150,10023) -11150,10065.04 D6.8@-11146.39,10068.65 D6.3@-11146.39,10104.09 ; C56.2@-10983.6,10888.36 -10983.48,10888.24 C232.2@-10983.48,10861.36 -10983.48,10845.11 -10980.23,10841.86 U11.3@-10980.23,10803.98 -10980.23,10759.77 ; v4@-10965,10042 D2.3@-10965,10068.65 v11(-10965,10087) D2.8@-10965,10104.09 -10965,10125 ; v4(-10825,10038) D1.3@-10825,10068.65 v11(-10825,10087) D1.8@-10825,10104.09 -10825,10125 ; -10766,11969 -10747.68,11987.32 U5.54@-10733.84,11987.32 -10702.32,11987.32 ; U5.55@-10733.84,12014.88 -10698.12,12014.88 ; U5.G19@-10651.52,12015.04 U5.G21@-10521.6,12015.04 ; U5.G1@-10651.52,12223.48 v4(-10644,12231) ; U5.G3@-10521.6,12226.4 v4(-10517,12231) ; v4(-10520,12157) -10521.6,12155.4 U5.G21@-10521.6,12015.04 ; v4(-10441.52,11802.52) U5.39@-10441.52,11834.76 ; -10423,11091 -10423,11098.01 C33.2@-10409.64,11111.37 ; v4(-10391,12222) -10391.68,12221.32 -10391.68,12015.04 U5.G21@-10521.6,12015.04 ; U5.37@-10386.4,11834.76 -10386.4,11817.4 -10374,11805
  BOTTOM w12: C262.2@-10454,10274.15 -10450.41,10270.56 U22.5@-10421.37,10270.56 U22.7@-10382,10270.56 ; U5.39@-10441.52,11834.76 -10441.52,11862.48
  BOTTOM w15: v9(-12959.66,10975.36) -12950.67,10984.35 R83.2@-12930.44,10984.35 ; v9(-12695.86,10501.1) R158.2@-12695.86,10534.03 ; v9(-12581.1,11037.51) U2.N1@-12567.66,11050.95 -12553.61,11065 -12474.7,11065 ; v9(-12421.33,11176.09) -12411.71,11176.09 -12411.71,11177.56 R85.2@-12396.93,11177.56 ; R88.1@-12383.37,11287.84 v9(-12383.37,11291) ; v2(-12224.86,10501) R141.2@-12224.86,10534.81 ; C128.2@-12153.41,10788.04 -12153.41,10797.59 v2(-12150,10801) ; X6.2@-12138.22,10668.86 -12138.22,10645.22 v2(-12126,10633) -12013.04,10633 -12007,10639.04 v2(-11988,10639.04) -11988,10658.04 -11994.56,10664.6 -11994.56,10687.56 v2(-12008,10701) -12012.82,10705.82 -12012.82,10711.86 -12042.66,10741.7 X6.4@-12047.66,10741.7 -12041.55,10747.81 C129.2@-12041.55,10787.36 -12041.55,10814.55 -12046,10819 v2(-12046,10838) ; R94.1@-12125.21,11911 -12125.21,11873.9 R131.2@-12124.14,11872.83 v2(-12105,11872.83) R153.2@-12086.14,11872.83 ; v2(-11893.14,10168.86) C265.2@-11873.63,10168.86 ; v2(-11857.97,10536) U20.2@-11857.97,10563.94 ; R212.2@-11841.55,12050.84 v2(-11841.55,12072.45) ; R213.2@-11766.86,10633.79 -11766.86,10606.86 -11765.86,10606.86 v2(-11761,10602) ; C261.2@-11763.29,10168.86 v9(-11743.14,10168.86) ; v9(-11645.17,10175.15) R147.2@-11645.17,10191.86 ; v4(-11111,11818) -11093,11836 D40.1@-11093,11840 D52.1@-11054.42,11840 ; C34.2@-10409.96,11220.07 -10409.96,11224.04 v2(-10395,11239) ; U5.37@-10386.4,11834.76 -10386.4,11860.6 v4(-10379,11868) ; v4(-10275,9704) -10298,9681 -10298,9468.78 -10216.23,9387 -10068,9387 -9969,9486 -9940,9486 -9907,9519 v2(-9888,9519) -9888,9543 -9910,9565 -9910,9598 -9893.58,9614.42 v2(-9888.58,9614.42)
  BOTTOM w20: J13.4@-12238.68,9616 -12238.68,9649
  BOTTOM w40: -12282,9616 J13.4@-12238.68,9616
  other v2: -12658,9406 -12788,9407 -12745,9407 -12701,9407 -12830,9409 -12745,9428 -11659,9487 -11601,9513 -12877,9515 -12776,9532 -12691,9534 -12896,9535 -12615,9551 -12632,9604 -12211,9641 -11107,9645 -12893,9646 -10997,9646 -11975,9648 -10922.76,9649.76 -11927,9652 -12118,9663 -11467,9680 -11539,9691 -12789,9693 -11927,9694 -11434,9701 -11462,9702 -12712,9725 -12458,9725 -11404,9728 -11376,9728 -12506,9729 -12282,9752 -12247,9756 -11920,9759 -12461,9765 -12713,9766 -12512,9766 -12555,9769 -12714,9804 -12544.66,9806.5 -12513.16,9811 -11907,9829 -12086,9839 -12708,9860 -12043,9888 -12806,9902 -12121,9911 -12330.9,9915 -12097,9929 -11911,9932 -12330.9,9965 -12288,9978 -12246,9994 -12201,9995 -11893,10000 -11794,10019 -11686,10032 -12133,10058 -12545,10070 -12577,10071 -12972,10142 -12584,10173 -12589,10238 -11546,10268 -11300.23,10282.2 -11250.23,10284.2 -11352.23,10286.2 -11564,10290 -11746,10295 -11705.85,10300.85 -12593,10308 -12085,10316 -11836,10320 -11706,10320 -11576,10327 -11353.23,10328.2 -11300.23,10330.2 -11617,10333 -11250.23,10333.2 -11527,10337 -12137,10358 -10724,10361 -12105,10362 -11620,10369 -10666,10412 -10511,10432 -11637,10435 -12112,10437 -12081,10437 -11400.23,10437.2 -11371.23,10438.2 -11337.23,10438.2 -11294.23,10438.2 -11254.23,10439.2 -11221.23,10439.2 -10666,10455 -11347,10462 -11607,10468 -11280,10469 -11206,10470 -10560,10470 -11253,10471 -11232,10471 -10984,10475 -10962,10475 -11608,10499 -10823,10526 -12034,10529 -10525,10531 -12079,10538 -12124,10544 -12006,10548 -10827,10590 -10443,10597 -12044,10712 -10701,10802 -10702,10825 -10658,10915 -10641,10915 -10886,10992 -10813,10992 -10802,11071 -10642,11076 -10822,11201 -10825,11242 -11445,11264 -10701,11267 -11057,11304 -11625,11307 -10758,11332 -11057,11333 -10707,11338 -10506,11352 -10896,11354 -10698,11358 -10703,11413 -10814,11414 -11057,11422 -10702,11430 -10813,11431 -10494,11433 -10503,11448 -10814,11459 -11115,11461 -11056,11462 -10802,11474 -11102,11478 -11560,11483 -11539,11484 -10376,11513 -10073,11537 -10108,11538 -11391,11539 -10422,11544 -10682,11546 -10873,11567 -10176,11568 -10410,11606 -10422.39,11615.88 -10915,11620 -12808,11750 -12848,11751 -12804,11809 -11823,11855 -12001,11862 -12155,11868 -12528.28,11882.5 -11923,11884 -11875,11897 -12029,11898 -12154,11917 -11920,11926 -11967,11927 -12056,11931 -12176,11948 -12226,11949 -11763.64,11952 -12015,11953 -11815,11970 -11826,11982 -12755,11994 -11968,12017 -12159,12020 -12132.81,12021.19 -12063,12023 -12357,12033 -12297.18,12036.57 -12742,12061 -12475,12070 -12487,12100
  other v4: -10415,9709 -10376,9709 -10339,9710 -11315,9768 -11266,9768 -10496,9789 -10556,9793 -10259,9794 -10644,9796 -11314,9813 -11266,9813 -10226,9835 -10605,9877 -10516,9880 -10204,9895 -10763,9914 -10707,9914 -10816,9945 -10762,9975 -10703,9975 -10704,10024 -10759,10027 -10896,10033 -10965,10035 -11277,10045 -9891,10069 -9909,10111 -9902,10194 -9889,10239 -10059,10494.1 -10038,10533 -10243,10565 -10194,10565 -10300,10566 -10039,10568 -10285,10618 -10092,10619 -10399,10730 -10399,10755 -10399,10780 -10399,10805 -10399,10830 -10400,10855 -10400,10880 -10400,10905 -10400,10930 -10464,11025 -10464,11075 -11078,11678 -10416,11682 -10221,11685 -10133,11690 -10178,11691 -10070,11691 -10520,11694 -10620,11696 -10416,11700 -10283,11702 -11483,11713 -11519,11719 -11426,11720 -11139,11724 -10181,11724 -10109,11725 -9889,11740 -10242,11744 -10201,11755.39 -11505,11768 -10691,11778 -10160,11782 -10214,11783 -10304,11796 -10473,11799 -10366,11804 -11506,11805 -10217,11816 -10169,11826 -10886.98,11835 -10769,11836 -11299,11840 -10218,11851 -10308,11862 -10422,11868 -10771,11877 -10342,11884 -10290,11889 -11203,11892 -10230,11904 -10208,11904 -10315,11906 -10070,11907 -11257,11914 -10762,11922 -10672,11924 -10229,11931 -10292,11932 -10112,11935 -10668,11976 -10098,11976 -10399,11979 -10538,11980 -10282,11980 -10582,11983 -10125,12006 -10666,12019 -10390,12028 -10100,12042 -10388,12061 -11754.14,12075.56 -10146,12077 -11560.52,12090.96 -11265.52,12090.96 -11601,12093 -10670,12095 -10370.68,12094.96 -10097,12095 -10984.52,12099.96 -11208.52,12100.96 -10908,12101 -11144.52,12101.96 -11069.52,12101.96 -10214,12116 -10286.19,12118 -10152,12122 -11207.52,12134.96 -10053,12136 -10103,12137 -11141.52,12149.96 -11071.52,12150.96 -10983.52,12151.96 -10608.52,12155.96 -10557.6,12155.96 -11271,12162 -10908,12163 -10309,12175 -10209,12176 -9986,12179 -9928,12181 -10115,12184 -10516,12186 -10564,12188 -10697,12189 -10618.52,12188.96 -10159,12195 -12542.52,12195.96 -12246,12199 -12306,12200 -10285,12203 -10232,12205 -12143,12218 -11069.52,12219.96 -10983.52,12222.96 -10314,12223 -10702,12226 -10907,12228 -10602,12231 -10561,12231 -12360,12234 -10284,12234 -12307,12236 -9968,12236 -9905,12236 -10230,12237 -10340,12259 -10632,12261 -10551,12261 -10305,12261 -10760,12264 -11654,12266 -12546,12268 -11550,12271 -11738,12272 -12146,12283 -10981,12286 -12627,12287 -10906,12289 -10231,12291 -10183,12293 -10143,12293 -12651.52,12306.96 -10088,12313 -9967,12313 -10012,12315 -12627,12318 -9913,12326 -10014,12339 -10086,12342 -12934,12346 -10231,12346 -12850,12347 -12750,12347 -12650,12347 -12350,12347 -12250,12347 -12150,12347 -12050,12347 -11950,12347 -11850,12347 -11762,12347 -11662,12347 -11562,12347 -11462,12347 -11405,12347 -11262,12347 -11062,12347 -10967,12347 -10867,12347 -10500,12347 -10450,12347 -10400,12347 -10350,12347 -10669,12348 -10604,12348
  other v6: -10628,9965 -10568,9983 -10339,10004 -10294,10004 -10628,10031 -10567,10038 -10421,10363 -10428,10383 -10329,10626 -10096,10645 -10351,10646 -10128,10647 -10399,10654 -10378,10664 -10122.41,10667.58 -10096,10668 -10334,10674 -10399,10679 -10132,10686 -10377,10692 -10096,10702 -10121,10703 -10399,10705 -10350,10709 -10379,10718 -10059,10726 -10280,10732 -10184,10735 -10349,10740 -10378,10743 -10088,10745 -10263,10750 -10054,10755 -10377,10767 -10185,10768 -10349,10769 -10266,10778 -10295,10782 -10063,10783 -10029,10784 -10104,10785 -10141,10788 -10377,10791 -10316,10802 -10174,10802 -10280,10803 -10249,10803 -10063,10812 -10029,10813 -10104,10814 -10378,10816 -10141,10817 -10330,10822 -10229,10822 -10294,10823 -10263,10823 -10166,10835 -10378,10842 -10062,10844 -10028,10845 -10103,10846 -10331,10848 -10219,10848 -10304,10849 -10277,10849 -10247,10849 -10140,10849 -10377,10868 -10164,10868 -10331,10871 -10304,10872 -10277,10872 -10247,10872 -10218,10874 -10063,10875 -10029,10876 -10104,10877 -10141,10880 -10164,10893 -10063,10903 -10031,10904 -10104,10905 -10139,10907 -10378,10910 -10164,10918 -10298,10920 -10268,10921 -10329,10922 -10068,10932 -10105,10933 -10036,10933 -10140,10935 -10329,10947 -10304,10947 -10279,10947 -10260,10948 -10403,10958 -10077,10961 -10114,10962 -10045,10962 -10237,10964 -10191,10965 -10164,10967 -9991,10968 -10327,10974 -10302,10974 -10277,10974 -10258,10975 -10400,10979 -10089,10989 -10057,10990 -10423,10991 -10164,10997 -10133,10998 -10004,11000 -10404,11005 -10327,11005 -10302,11005 -10277,11005 -10258,11006 -10424,11015 -10071,11016 -10234,11026 -10404,11030 -10327,11030 -10302,11030 -10277,11030 -10167,11030 -10258,11031 -10017,11032 -10424,11043 -10240,11048 -10400,11054 -10031,11054 -10327,11055 -10217,11055 -10001,11067 -10421,11069 -10046,11077 -10400,11079 -10225,11079 -10168,11084 -10018,11094 -10251,11097 -10138,11101 -10066,11105 -9999,11116 -10384,11117 -10040,11121 -10275,11124 -10166,11125 -10257,11140 -10110,11140 -10016,11145 -10377,11148 -10068,11148 -10110,11156 -10334,11171 -10109,11192 -10215,11194 -10326,11195 -10301,11195 -10109,11212 -10109,11232 -10109,11249 -10308,11302 -10268,11302 -10228,11302 -10188,11302 -10268,11342 -10228,11342 -10188,11342
  other v9: -12864,9944 -12885,10026 -12620,10133 -11701,10164 -12634,10184 -12637,10232 -12962,10257 -12733,10300 -10738,10301 -12623,10308 -12961,10314 -12733,10333 -12880,10487.56 -12964,10517 -12961,10627 -12957,10757 -12584,10771 -12515,10771 -12665,10774 -12382,10786 -12712,10809 -12756,10846 -12429,10919 -12410,10919 -12389,10919 -12800,11003 -12952.86,11049.56 -12958,11104 -12583,11134 -12958,11157 -12859,11447 -12807,11465 -12421,11492 -12911,11500 -9936,11533 -12447,11577 -12683,11579 -12623,11579 -12558,11579 -12496,11579 -12959,11588 -12819.8,11589 -9943,11609 -12334,11626 -12671,11677.42 -12602.76,11679.07 -12499,11685 -12715.53,11686.39 -12457,11694 -12370,11715 -12389,11717 -12062,11800 -12002,11806 -12374,11807 -11923,11854 -11872,11856
  other v11: -11071,10059 -11041,10060 -10897,10063 -10759,10075 -10704,10075 -11277,10087 -11039,10090 -11067,10091 -10896,10095 -10896,10124 -11068,10128 -11039,10132 -10703,10154 -11014,10163 -10916,10164 -10818,10164 -10975,10166 -10955,10166 -10877,10166 -10835,10167 -10772,10170 -10634,10186 -10704,10187 -10898,10190 -10793,10199 -10996,10200 -9942,10272 -9941,10301 -10013,10305 -9939,10368 -10011,10401 -9917,10473 -9954,10475 -9948,10511 -9918,10513 -9916,10635 -9894,11670 -9925,11746 -9949,11772 -9912,11809 -9956,11842
  other v12: -10492,10065 -10343,10065 -10285,10065 -10416,10068 -10503,10083 -10404,10085 -10629,10090 -10384,10112 -10285,10112 -10340,10113 -10505,10133 -10399,10137 -10605,10160 -10576,10185 -10152,10199 -10143,10215 -10242,10234 -10262,10242 -10141,10243 -10299,10246 -10371,10247 -10393,10248 -10195.27,10268.56 -10456,10272 -9965,10733 -9969,10764 -9972,10801 -9972,10834 -9972,10866 -9972,10899 -9965,10923 -9983,10932 -9969,10958 -9974,11003 -9984,11036 -9966,11060 -9975,11090 -9983,11135
  other v13: -10577,10365 -10056,11196 -10012,11256 -10019,11336 -10308,11342 -10019,11368 -10308,11382 -10268,11382 -10228,11382 -10188,11382 -10308,11422 -10268,11422 -10228,11422 -10188,11422 -10268,11462 -10228,11462 -10188,11462 -10309.22,11462.78 -10074,11475
  other v18: -10554,10293